# EAGLE board display2 (EAGLE 4.16)
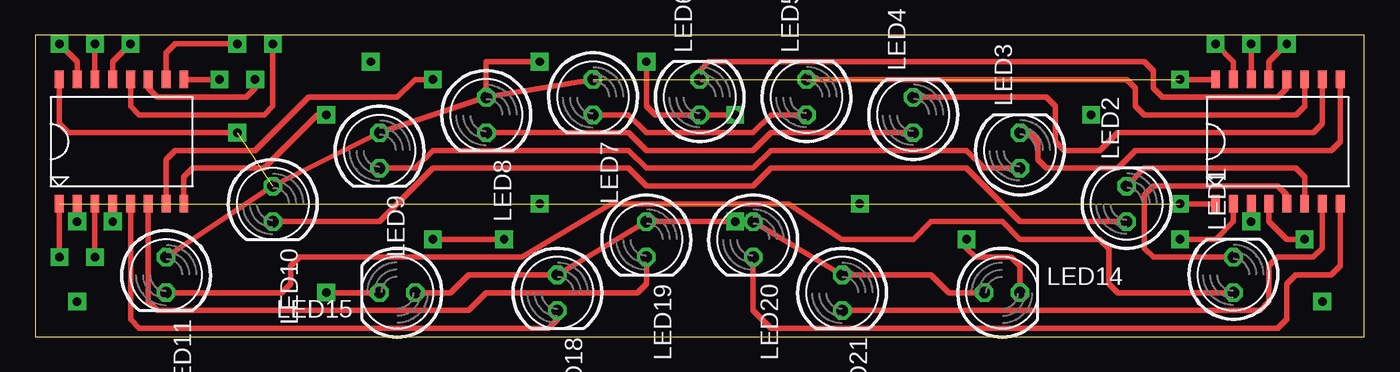
[diagram p0: board, top side]
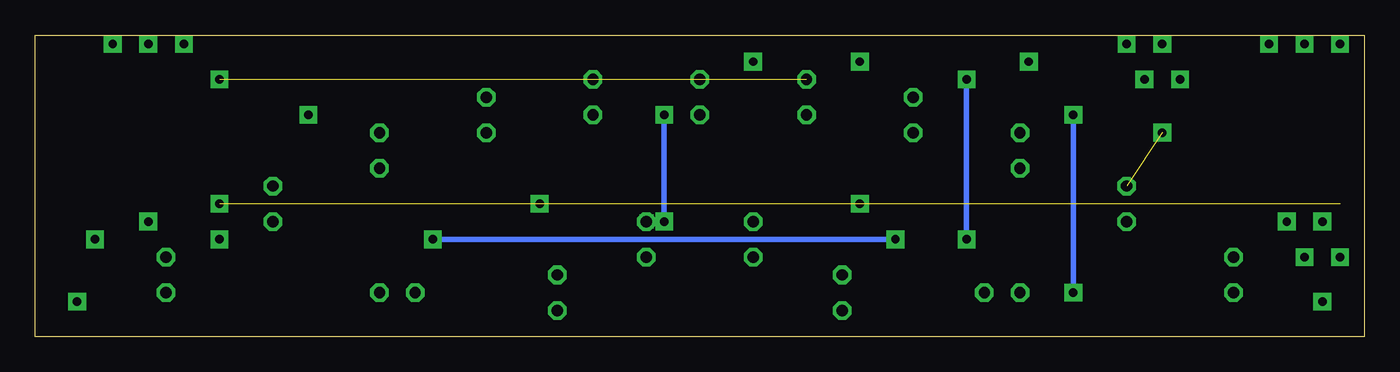
[diagram p1: board, bottom side, seen from below]

Size 94.92 x 21.58 mm. Coordinates in mm from the lower left corner, seen from the top.
Outline: 0,0 94.92,0 94.92,21.58 0,21.58 0,0
Copper layers (1*16): Top 0.035mm / dielectric 1.5mm / Bottom 0.035mm
Design rules "default": minimum track width 10mil, minimum drill 24mil, track to track 8mil, track to pad 8mil, pad to pad 8mil, via to via 8mil, smd to smd 8mil, copper to edge 40mil, drill to drill 8mil, minimum pad ring 10mil, minimum via ring 8mil, stop-mask expansion 4mil, vias tented up to drill 0mil, thermal gap 10mil

## Footprints (pad centres in the part's own frame; a part is rotated, then mirrored left to right if it is on the bottom)
LED5MM = drill 0.813 octagon: A -1.27,0; K 1.27,0
SOIC16 = smd 1.27 x 0.635: 1 -2.54,2.54; 2 -2.54,1.27; 3 -2.54,0; 4 -2.54,-1.27; 5 -2.54,-2.54; 6 -2.54,-3.81; 7 -2.54,-5.08; 8 -2.54,-6.35; 9 6.35,-6.35; 10 6.35,-5.08; 11 6.35,-3.81; 12 6.35,-2.54; 13 6.35,-1.27; 14 6.35,0; 15 6.35,1.27; 16 6.35,2.54

## Placement (x,y rotation side)
LED1  [LED5MM]  85.56,4.44 90 top
LED2  [LED5MM]  77.94,9.52 90 top
LED3  [LED5MM]  70.32,13.33 90 top
LED4  [LED5MM]  62.7,15.87 90 top
LED5  [LED5MM]  55.08,17.14 90 top
LED6  [LED5MM]  47.46,17.14 90 top
LED7  [LED5MM]  39.84,17.14 270 top
LED8  [LED5MM]  32.22,15.87 270 top
LED9  [LED5MM]  24.6,13.33 270 top
LED10  [LED5MM]  16.98,9.52 270 top
LED11  [LED5MM]  9.36,4.44 270 top
LED14  [LED5MM]  69.05,3.17 0 top
LED15  [LED5MM]  25.87,3.17 180 top
LED18  [LED5MM]  37.3,3.17 270 top
LED19  [LED5MM]  43.65,6.98 270 top
LED20  [LED5MM]  51.27,6.98 270 top
LED21  [LED5MM]  57.62,3.17 270 top
U$1  A6275  [SOIC16]  86.83,12.06 90 top
U$3  A6275  [SOIC16]  4.28,12.06 90 top

## Library data of the parts
LED1-LED11 LED14 LED15 LED18-LED21 = led
U$1 U$3 = rnie04

## Nets
0V: U$1.1 U$3.1
+3V3: LED6.A LED14.A LED15.A LED18.A LED19.A LED20.A LED21.A
+5V: LED7.A LED8.A LED9.A LED10.A LED11.A U$1.16 U$3.16
N$1: LED1.K U$1.5
N$2: LED2.K U$1.6
N$3: LED3.K U$1.9
N$4: LED4.K U$1.10
N$5: LED5.K U$1.11
N$6: LED6.K U$1.12
N$7: LED18.K U$3.5
N$8: LED19.K U$3.6
N$9: LED20.K U$1.8
N$10: LED14.K U$3.7
N$11: U$1.2
N$12: U$1.3
N$13: U$1.4
N$14: U$3.2
N$16: LED1.A LED11.K
N$17: LED2.A LED10.K
N$18: LED3.A LED9.K
N$19: LED4.A LED8.K
N$20: LED5.A LED7.K
N$21: U$3.3
N$22: U$3.4
N$23: U$3.13
N$24: U$1.13
N$25: LED15.K U$3.8
N$26: U$1.15
N$27: U$3.15
N$32: LED21.K U$1.7
S$1: U$3.9
S$2: U$3.10
S$3: U$3.11
S$4: U$3.12
S$9: U$1.14
S$10: U$3.14

## Tracks (layer width: path | path; a pad name or v marks a point on that pad's centre or on a via)
0V  (via drill 0.6 pad 1.27)  (1 unrouted)
  Top 0.406: v1.74,5.71 U$3.1 | v81.75,9.52 U$1.1
+3V3  (via drill 0.6, 0.6 pad 1.27)
  Top 0.406: v50,8.25 LED20.A | v50,8.25 LED19.A LED18.A 30.95,4.44 29.68,3.17 LED15.A | v50,8.25 LED20.A | LED20.A LED21.A 63.97,4.44 65.24,3.17 LED14.A | v50,15.87 LED6.A 44.28,15.87 43.65,16.51 v43.65,19.68
  Bottom 0.406: v50,8.25 v50,15.87
  other vias: 51.27,8.25
+5V  (via drill 0.6 pad 1.27)  (2 unrouted)
  Top 0.406: LED11.A LED10.A LED9.A LED8.A | LED8.A LED7.A | U$3.16 1.74,15.24 2.38,14.6 v14.44,14.6 | v81.75,18.41 U$1.16 | LED8.A 32.22,19.68 v36.03,19.68
N$1
  Top 0.406: LED1.K 79.85,5.71 79.21,6.35 79.21,10.16 79.85,10.79 88.74,10.79 89.37,10.16 U$1.5
N$2
  Top 0.406: U$1.6 90.64,11.43 90.01,12.06 79.21,12.06 LED2.K
N$3
  Top 0.406: LED3.K 70.96,14.6 71.59,13.96 71.59,12.7 72.23,12.06 77.31,12.06 78.58,13.33 92.55,13.33 93.18,13.96 U$1.9
N$4
  Top 0.406: LED4.K 72.23,17.14 72.86,16.51 72.86,13.96 73.5,13.33 76.04,13.33 77.31,14.6 91.28,14.6 91.91,15.24 U$1.10
N$5
  Top 0.406: LED5.K 77.94,18.41 78.58,17.77 78.58,16.51 79.21,15.87 90.01,15.87 90.64,16.51 U$1.11
N$6
  Top 0.406: LED6.K 47.46,19.05 48.09,19.68 79.21,19.68 79.85,19.05 79.85,17.77 80.48,17.14 88.74,17.14 89.37,17.77 U$1.12
N$7
  Top 0.406: LED18.K 37.3,1.27 36.66,0.63 7.46,0.63 6.82,1.27 U$3.5
N$8
  Top 0.406: LED19.K 43.65,3.8 43.02,3.17 32.22,3.17 30.95,1.9 8.72,1.9 8.09,2.54 U$3.6
N$9
  Top 0.406: U$1.8 93.18,5.08 92.55,4.44 90.01,4.44 89.37,3.8 89.37,1.27 88.74,0.63 52.54,0.63 51.27,1.9 LED20.K
N$10  (via drill 0.6 pad 1.27)
  Top 0.406: LED14.K 70.32,5.08 69.69,5.71 67.15,5.71 66.51,6.35 v66.51,6.98 | v28.41,6.98 v33.49,6.98 | v28.41,18.41 27.14,18.41 25.87,17.14 19.52,17.14 15.71,13.33 9.99,13.33 9.36,12.7 U$3.7
  Bottom 0.406: v33.49,6.98 v66.51,6.98 | v28.41,18.41 v28.41,6.98
N$11  (via drill 0.6 pad 1.27)
  Top 0.406: v81.75,6.98 84.29,6.98 85.56,8.25 U$1.2
N$12  (via drill 0.6 pad 1.27)
  Top 0.406: v86.83,8.25 U$1.3
N$13  (via drill 0.6 pad 1.27)
  Top 0.406: U$1.4 88.1,8.25 89.37,6.98 v90.64,6.98
N$14  (via drill 0.6 pad 1.27)
  Top 0.406: v3.01,8.25 U$3.2
N$16
  Top 0.406: LED11.K 17.61,3.17 18.25,3.8 18.25,5.08 18.88,5.71 34.76,5.71 41.11,9.52 53.81,9.52 57.62,6.98 62.7,6.98 63.97,8.25 69.05,8.25 70.32,6.98 76.04,6.98 76.67,6.35 76.67,3.8 77.31,3.17 LED1.A
N$17
  Top 0.406: LED10.K 24.6,8.25 28.41,12.06 42.38,12.06 43.65,10.79 51.27,10.79 52.54,12.06 66.51,12.06 70.32,8.25 LED2.A
N$18
  Top 0.406: LED9.K 27.14,12.06 28.41,13.33 42.38,13.33 43.65,12.06 51.27,12.06 52.54,13.33 66.51,13.33 67.78,12.06 LED3.A
N$19
  Top 0.406: LED8.K 42.38,14.6 43.65,13.33 51.27,13.33 52.54,14.6 LED4.A
N$20
  Top 0.406: LED7.K 42.38,15.87 43.65,14.6 51.27,14.6 52.54,15.87 LED5.A
N$21  (via drill 0.6 pad 1.27)
  Top 0.406: v4.28,5.71 U$3.3
N$22  (via drill 0.6 pad 1.27)
  Top 0.406: v5.55,8.25 U$3.4
N$23  (via drill 0.6 pad 1.27)
  Top 0.406: U$3.13 5.55,19.68 v6.82,20.95
N$24  (via drill 0.6 pad 1.27)
  Top 0.406: U$1.13 88.1,19.68 v89.37,20.95
N$25  (via drill 0.6 pad 1.27)
  Top 0.406: v20.79,3.17 LED15.K | U$3.8 10.63,11.43 11.27,12.06 16.34,12.06 20.16,15.87 v20.79,15.87
  Bottom 0.406: v20.79,15.87 v20.79,3.17
N$26  (via drill 0.6 pad 1.27)
  Top 0.406: U$1.15 85.56,19.68 v84.29,20.95
N$27  (via drill 0.6 pad 1.27)
  Top 0.406: U$3.15 3.01,19.68 v1.74,20.95
N$28  (via drill 0.6 pad 1.27)
  other vias: 3.01,2.54
N$29  (via drill 0.6 pad 1.27)
  other vias: 91.91,2.54
N$31  (via drill 0.6 pad 1.27)
  other vias: 23.96,19.68
N$32
  Top 0.406: LED21.K 87.47,1.9 88.1,2.54 88.1,5.08 88.74,5.71 91.28,5.71 91.91,6.35 U$1.7
N$33  (via drill 0.6 pad 1.27)
  other vias: 75.4,15.87
S$1  (via drill 0.6 pad 1.27)
  Top 0.406: U$3.9 v13.17,18.41
S$2  (via drill 0.6 pad 1.27)
  Top 0.406: U$3.10 9.36,20.32 9.99,20.95 v14.44,20.95
S$3  (via drill 0.6 pad 1.27)
  Top 0.406: U$3.11 8.09,17.77 8.72,17.14 15.07,17.14 15.71,17.77 v15.71,18.41
S$4  (via drill 0.6 pad 1.27)
  Top 0.406: U$3.12 6.82,16.51 7.46,15.87 16.34,15.87 16.98,16.51 v16.98,20.95
S$5  (via drill 0.6 pad 1.27)
  other vias: 58.89,9.52
S$9  (via drill 0.6 pad 1.27)
  Top 0.406: U$1.14 v86.83,20.95
S$10  (via drill 0.6 pad 1.27)
  Top 0.406: U$3.14 v4.28,20.95
S$11  (via drill 0.6 pad 1.27)
  other vias: 36.03,9.52